# EAGLE board 5x4 Macropad PCB Design (EAGLE 9.7.0)
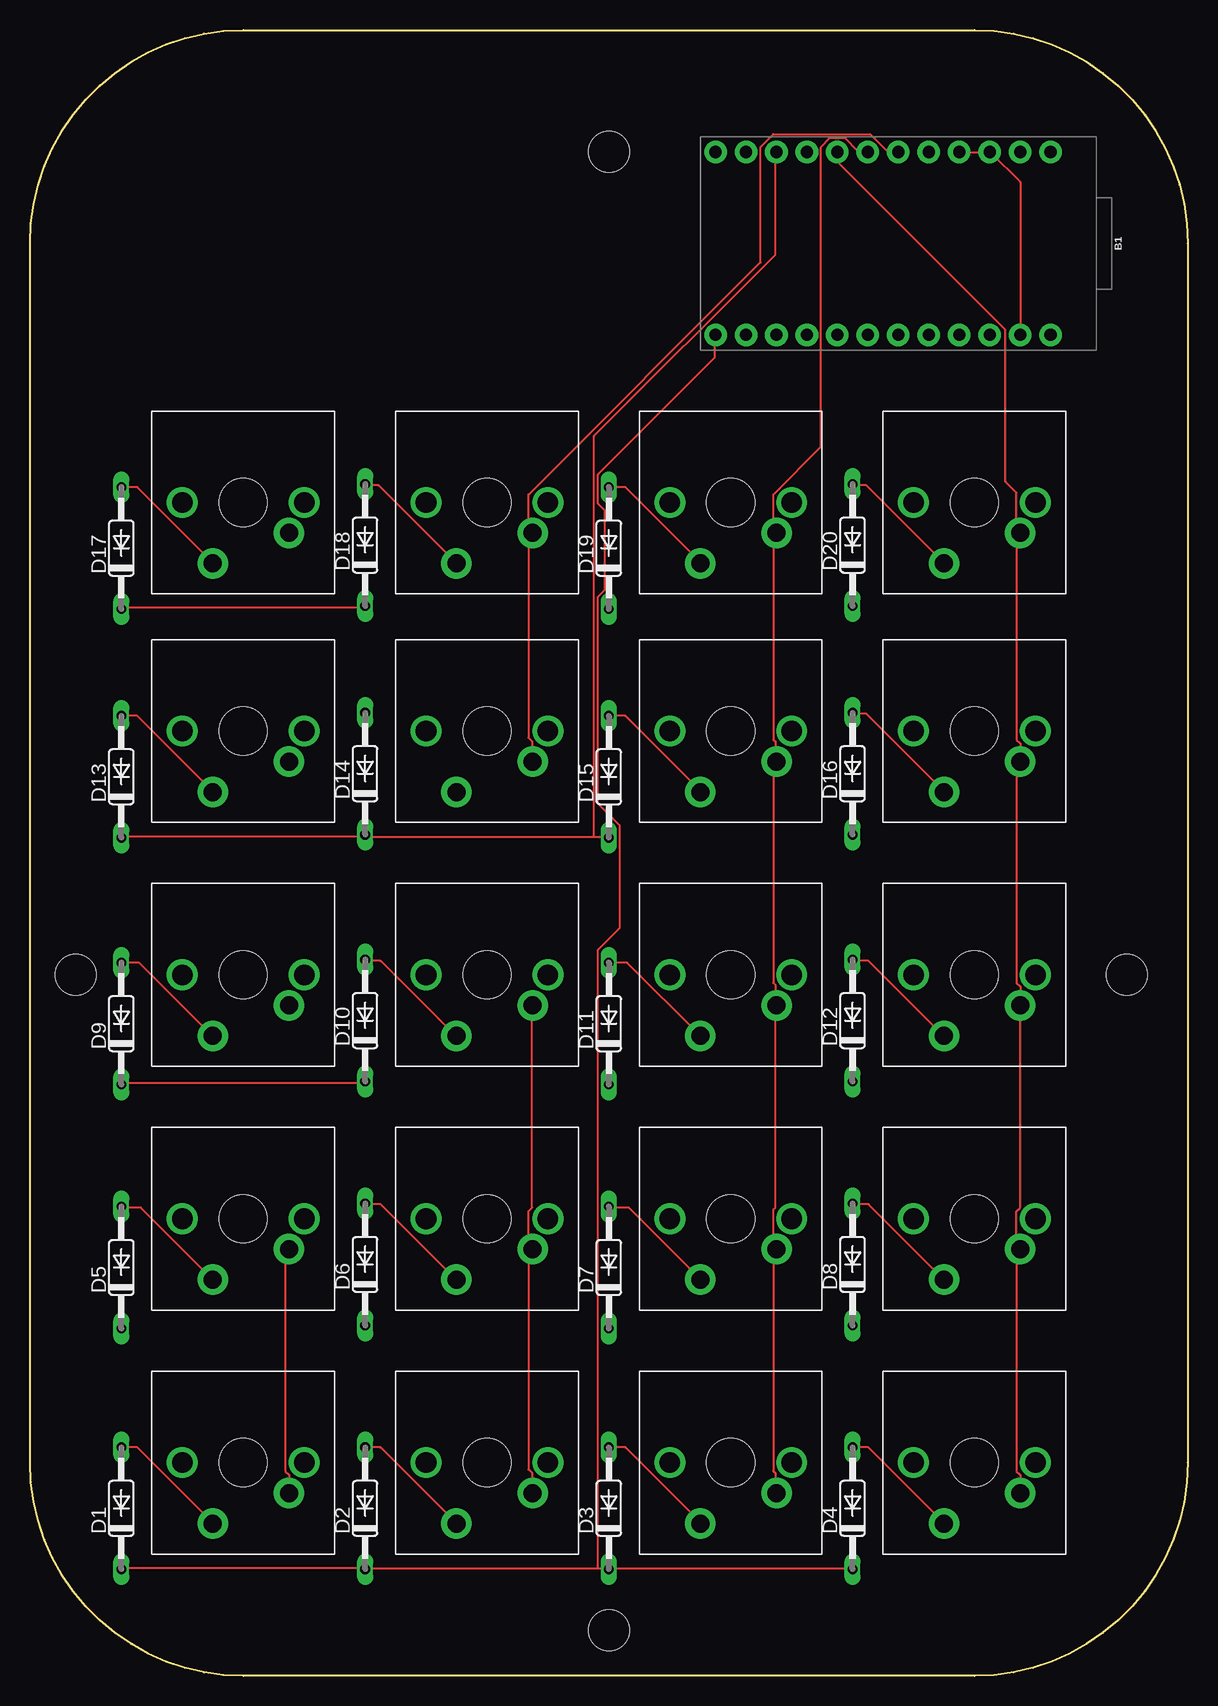
[diagram p0: board, top side]
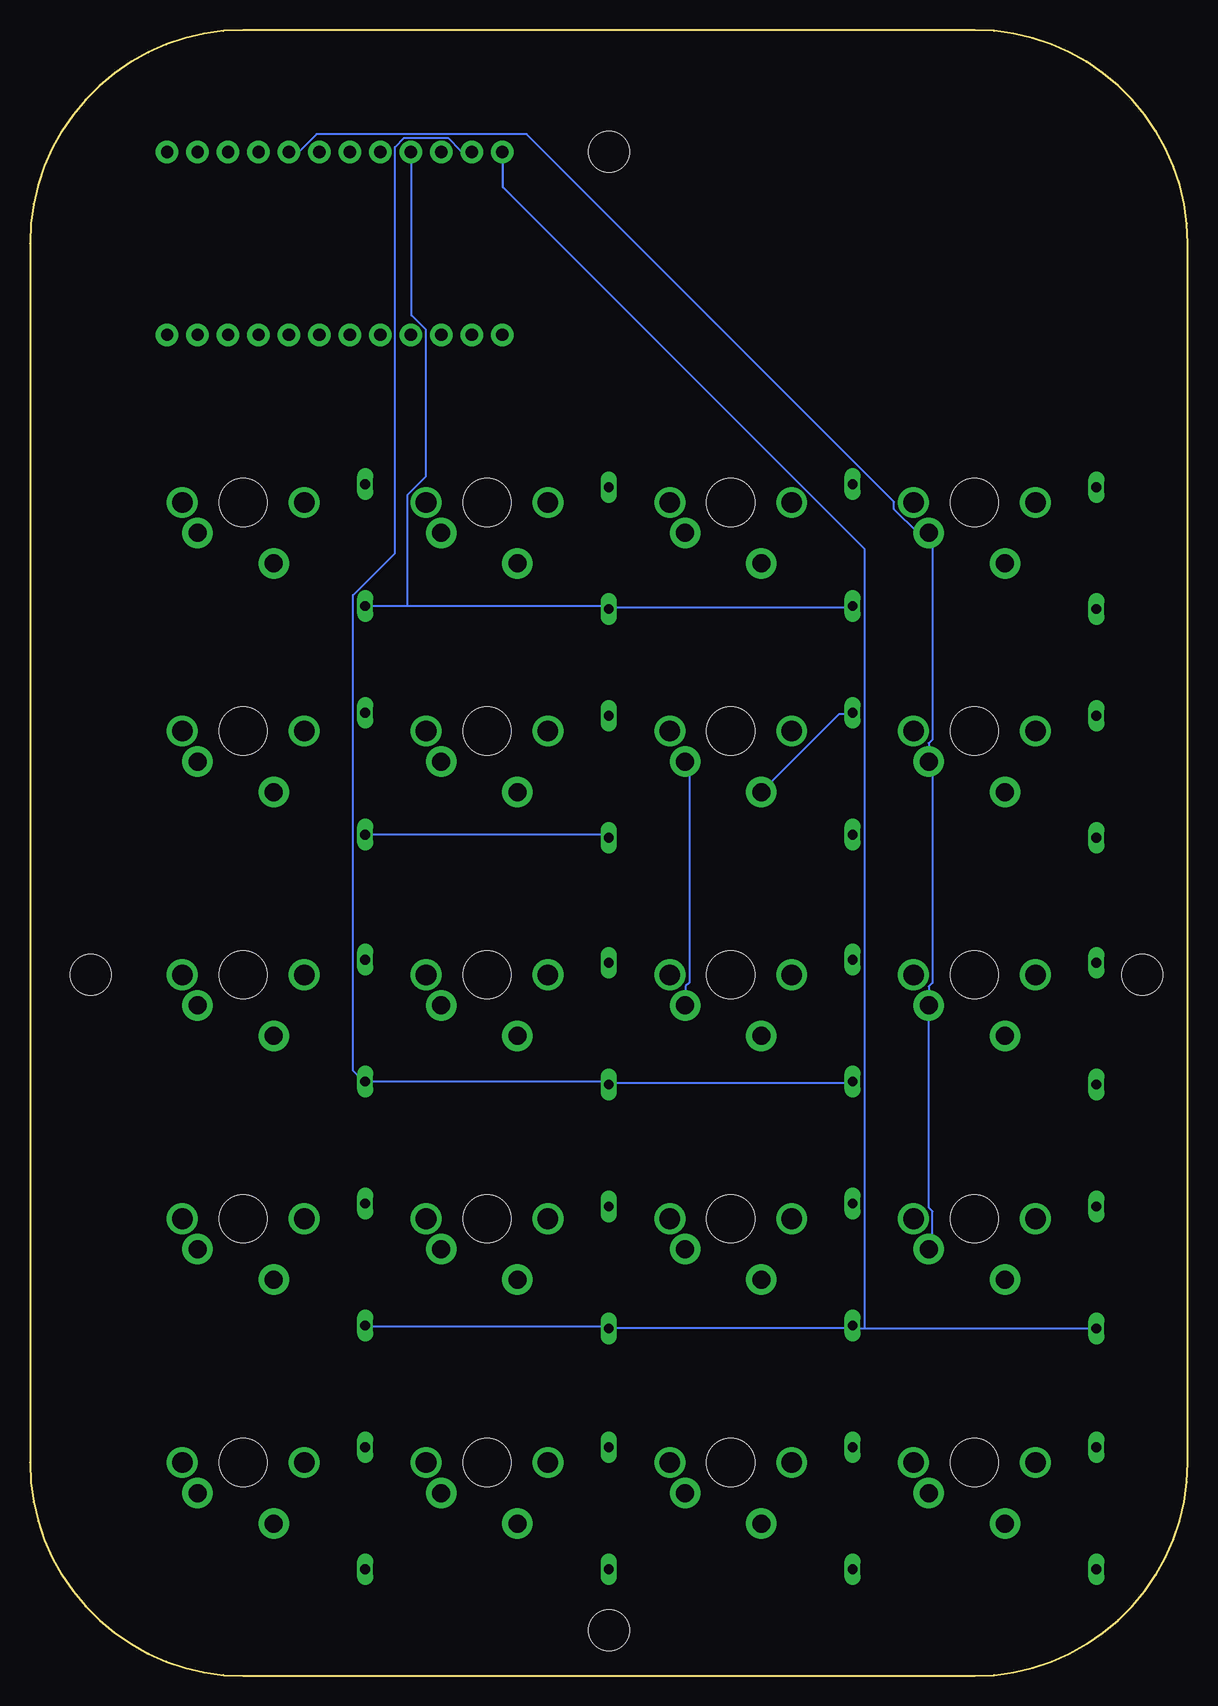
[diagram p1: board, bottom side, seen from below]

Size 96.52 x 137.16 mm. Coordinates in mm from the lower left corner, seen from the top.
Outline: 78.74,137.16 arc-90 96.52,119.38 96.52,17.78 arc-90 78.74,0 17.78,0 arc-90 0,17.78 0,119.38 arc-90 17.78,137.16 78.74,137.16
Copper layers (1*16): Top 0.035mm / dielectric 1.5mm / Bottom 0.035mm
Design rules "Fusion Electronics Design Rules": minimum track width 6mil, minimum drill 0.35mm, track to track 6mil, track to pad 6mil, pad to pad 6mil, via to via 6mil, smd to smd 6mil, copper to edge 40mil, drill to drill 6mil, minimum pad ring 10mil, minimum via ring 8mil, stop-mask expansion 4mil, vias tented up to drill 0mil, thermal gap 10mil
Holes 3.4 mm at 48.26,3.81 48.26,127 91.44,58.42 3.81,58.42

## Footprints (pad centres in the part's own frame; a part is rotated, then mirrored left to right if it is on the bottom)
SPARKFUN_PRO_MICRO = drill 1.016 pad 1.88: 1 -7.62,12.7; 2 -7.62,10.16; 3 -7.62,7.62; 4 -7.62,5.08; 5 -7.62,2.54; 6 -7.62,0; 7 -7.62,-2.54; 8 -7.62,-5.08; 9 -7.62,-7.62; 10 -7.62,-10.16; 11 -7.62,-12.7; 12 -7.62,-15.24; 13 7.62,-15.24; 14 7.62,-12.7; 15 7.62,-10.16; 16 7.62,-7.62; 17 7.62,-5.08; 18 7.62,-2.54; 19 7.62,0; 20 7.62,2.54; 21 7.62,5.08; 22 7.62,7.62; 23 7.62,10.16; 24 7.62,12.7
DO35-10 = drill 0.813 long: A 5.08,0; C -5.08,0
CHERRY-MX = drill 1.714 pad 1.93: P$3 -5.08,0; P$4 5.08,0 | drill 1.5 pad 2.54: SW1 -3.81,2.54; SW2 2.54,5.08 | hole 4: 0,0

## Placement (x,y rotation side)
B1  SPARKFUN_PRO_MICRO  [SPARKFUN_PRO_MICRO]  72.39,119.38 270 top
D1  1N4148DO35-10  [DO35-10]  7.62,13.97 90 top
D2  1N4148DO35-10  [DO35-10]  27.94,13.97 90 top
D3  1N4148DO35-10  [DO35-10]  48.26,13.97 90 top
D4  1N4148DO35-10  [DO35-10]  68.58,13.97 90 top
D5  1N4148DO35-10  [DO35-10]  7.62,34.04 90 top
D6  1N4148DO35-10  [DO35-10]  27.94,34.29 90 top
D7  1N4148DO35-10  [DO35-10]  48.26,34.04 90 top
D8  1N4148DO35-10  [DO35-10]  68.58,34.29 90 top
D9  1N4148DO35-10  [DO35-10]  7.62,54.36 90 top
D10  1N4148DO35-10  [DO35-10]  27.94,54.61 90 top
D11  1N4148DO35-10  [DO35-10]  48.26,54.36 90 top
D12  1N4148DO35-10  [DO35-10]  68.58,54.61 90 top
D13  1N4148DO35-10  [DO35-10]  7.62,74.93 90 top
D14  1N4148DO35-10  [DO35-10]  27.94,75.18 90 top
D15  1N4148DO35-10  [DO35-10]  48.26,74.93 90 top
D16  1N4148DO35-10  [DO35-10]  68.58,75.18 90 top
D17  1N4148DO35-10  [DO35-10]  7.62,93.98 90 top
D18  1N4148DO35-10  [DO35-10]  27.94,94.23 90 top
D19  1N4148DO35-10  [DO35-10]  48.26,93.98 90 top
D20  1N4148DO35-10  [DO35-10]  68.58,94.23 90 top
U$1  CHERRY-MX  [CHERRY-MX]  17.78,17.78 180 top
U$2  CHERRY-MX  [CHERRY-MX]  38.1,17.78 180 top
U$3  CHERRY-MX  [CHERRY-MX]  58.42,17.78 180 top
U$4  CHERRY-MX  [CHERRY-MX]  78.74,17.78 180 top
U$5  CHERRY-MX  [CHERRY-MX]  17.78,38.1 180 top
U$6  CHERRY-MX  [CHERRY-MX]  38.1,38.1 180 top
U$7  CHERRY-MX  [CHERRY-MX]  58.42,38.1 180 top
U$8  CHERRY-MX  [CHERRY-MX]  78.74,38.1 180 top
U$9  CHERRY-MX  [CHERRY-MX]  17.78,58.42 180 top
U$10  CHERRY-MX  [CHERRY-MX]  38.1,58.42 180 top
U$11  CHERRY-MX  [CHERRY-MX]  58.42,58.42 180 top
U$12  CHERRY-MX  [CHERRY-MX]  78.74,58.42 180 top
U$13  CHERRY-MX  [CHERRY-MX]  17.78,78.74 180 top
U$14  CHERRY-MX  [CHERRY-MX]  38.1,78.74 180 top
U$15  CHERRY-MX  [CHERRY-MX]  58.42,78.74 180 top
U$16  CHERRY-MX  [CHERRY-MX]  78.74,78.74 180 top
U$17  CHERRY-MX  [CHERRY-MX]  17.78,97.79 180 top
U$18  CHERRY-MX  [CHERRY-MX]  38.1,97.79 180 top
U$19  CHERRY-MX  [CHERRY-MX]  58.42,97.79 180 top
U$20  CHERRY-MX  [CHERRY-MX]  78.74,97.79 180 top

## Library data of the parts
B1 = SparkFun-Boards
D1-D20 = diode
U$1-U$20 = cherrymx

## Nets
GND: B1.3 B1.4 B1.23
N$1: D1.A U$1.SW2
N$2: D2.A U$2.SW2
N$3: D3.A U$3.SW2
N$4: D4.A U$4.SW2
N$5: D5.A U$5.SW2
N$6: D6.A U$6.SW2
N$7: D7.A U$7.SW2
N$8: D8.A U$8.SW2
N$9: D9.A U$9.SW2
N$10: D10.A U$10.SW2
N$11: D11.A U$11.SW2
N$12: D12.A U$12.SW2
N$13: D13.A U$13.SW2
N$14: D14.A U$14.SW2
N$15: D15.A U$15.SW2
N$16: D16.A U$16.SW2
N$17: D17.A U$17.SW2
N$18: D18.A U$18.SW2
N$19: D19.A U$19.SW2
N$20: D20.A U$20.SW2
N$21: B1.8 U$4.SW1 U$8.SW1 U$12.SW1 U$16.SW1 U$20.SW1
N$22: B1.7 U$3.SW1 U$7.SW1 U$11.SW1 U$15.SW1 U$19.SW1
N$23: B1.6 U$2.SW1 U$6.SW1 U$10.SW1 U$14.SW1 U$18.SW1
N$24: B1.5 U$1.SW1 U$5.SW1 U$9.SW1 U$13.SW1 U$17.SW1
N$25: B1.9 D17.C D18.C D19.C D20.C
N$26: B1.10 D13.C D14.C D15.C D16.C
N$27: B1.11 D9.C D10.C D11.C D12.C
N$28: B1.12 D5.C D6.C D7.C D8.C
N$29: B1.13 D1.C D2.C D3.C D4.C
RAW: B1.24
VCC: B1.21

## Tracks (layer width: path | path; a pad name or v marks a point on that pad's centre or on a via)
GND
  Top 0.152: B1.4 77.52,126.95 79.96,126.95 B1.3 80.11,126.95 82.55,124.51 82.55,111.86 B1.23
N$1
  Top 0.152: D1.A 7.72,19.05 8.94,19.05 15.19,12.8 U$1.SW2
N$2
  Top 0.152: D2.A 27.99,19.05 29.21,19.05 35.46,12.8 U$2.SW2
N$3
  Top 0.152: D3.A 49.63,19.05 55.88,12.8 U$3.SW2
N$4
  Top 0.152: D4.A 68.68,19.05 69.9,19.05 76.15,12.8 U$4.SW2
N$5
  Top 0.152: D5.A 7.72,39.01 9.25,39.01 15.19,33.07 U$5.SW2
N$6
  Top 0.152: D6.A 27.99,39.32 29.21,39.32 35.46,33.07 U$6.SW2
N$7
  Top 0.152: D7.A 48.26,39.01 49.94,39.01 55.88,33.07 U$7.SW2
N$8
  Top 0.152: D8.A 68.68,39.32 69.9,39.32 76.15,33.07 U$8.SW2
N$9
  Top 0.152: D9.A 7.72,59.44 9.09,59.44 15.19,53.34 U$9.SW2
N$10
  Top 0.152: D10.A 27.99,59.59 29.21,59.59 35.46,53.34 U$10.SW2
N$11
  Top 0.152: D11.A 49.78,59.44 U$11.SW2
N$12
  Top 0.152: D12.A 68.68,59.59 69.9,59.59 76.15,53.34 U$12.SW2
N$13
  Top 0.152: D13.A 7.72,80.01 8.94,80.01 15.19,73.76 U$13.SW2
N$14
  Bottom 0.152: D14.A 27.99,80.16 29.06,80.16 35.46,73.76 U$14.SW2
N$15
  Top 0.152: D15.A 49.63,80.01 55.88,73.76 U$15.SW2
N$16
  Top 0.152: D16.A 68.68,80.16 69.75,80.16 76.15,73.76 U$16.SW2
N$17
  Top 0.152: D17.A 7.72,99.06 8.94,99.06 15.19,92.81 U$17.SW2
N$18
  Top 0.152: D18.A 27.99,99.21 29.06,99.21 35.46,92.81 U$18.SW2
N$19
  Top 0.152: D19.A 49.63,99.06 55.88,92.81 U$19.SW2
N$20
  Top 0.152: D20.A 68.68,99.21 69.75,99.21 76.15,92.81 U$20.SW2
N$21
  Top 0.152: U$4.SW1 82.55,16.76 82.24,17.07 82.24,35.2 82.55,35.51 U$8.SW1 82.55,35.66 82.24,35.97 82.24,38.71 82.55,39.01 82.55,55.78 U$12.SW1 82.55,55.93 82.55,57.45 82.24,57.76 82.24,75.89 U$16.SW1 82.55,77.72 82.24,78.03 82.24,94.95 U$20.SW1 82.24,95.56 82.24,98.6 81.33,99.52 81.33,112.17 67.31,126.19 67.31,126.95 B1.8
N$22
  Top 0.152: U$3.SW1 62.13,15.24 62.13,16.92 61.98,17.07 61.98,35.36 62.13,35.51 U$7.SW1 62.13,35.66 61.98,35.81 61.98,38.86 62.13,39.01 62.13,55.78 U$11.SW1 62.13,55.93 62.13,57.61 61.98,57.76 61.98,76.05 62.13,76.2 | 61.98,95.4 61.98,98.45 65.94,102.41 65.94,127.41 66.7,128.17 67.92,128.17 68.99,127.1 69.75,127.1 B1.7 | 61.98,95.4 62.13,95.25 U$19.SW1 61.98,95.4 | 62.13,76.2 62.13,77.88 61.98,78.03 61.98,95.4 | 62.13,76.2 U$15.SW1 62.13,76.2
N$23
  Top 0.152: U$2.SW1 41.86,15.24 41.86,16.92 41.55,17.22 41.55,35.2 41.86,35.51 U$6.SW1 41.86,35.66 41.55,35.97 41.55,38.71 41.86,39.01 41.86,55.78 U$10.SW1 | 41.86,95.25 41.55,95.56 41.55,98.45 60.91,117.8 60.91,127.41 61.98,128.47 70.05,128.47 71.42,127.1 72.34,127.1 B1.6 | 41.86,95.25 U$18.SW1 41.86,95.25 | 41.86,95.25 41.55,94.95 41.55,78.18 41.86,77.88 41.86,76.2 U$14.SW1
  Bottom 0.152: U$10.SW1 41.86,55.93 41.86,57.45 41.55,57.76 41.55,75.89 41.86,76.2 U$14.SW1
N$24
  Top 0.152: U$1.SW1 21.59,16.76 21.29,17.07 21.29,35.2 21.59,35.51 U$5.SW1
  Bottom 0.152: U$5.SW1 21.59,35.66 21.29,35.97 21.29,38.71 21.59,39.01 21.59,55.78 U$9.SW1 21.59,55.93 21.59,57.45 21.29,57.76 21.29,75.89 U$13.SW1 21.59,77.72 21.29,78.03 21.29,94.95 U$17.SW1 22.5,95.25 24.49,97.23 24.49,97.84 55.12,128.47 72.64,128.47 74.02,127.1 74.93,127.1 B1.5
N$25
  Top 0.152: D17.C 7.72,89 27.69,89 27.84,89.15 D18.C
  Bottom 0.152: 48.26,89 28.14,89 27.99,89.15 D18.C | 48.26,89 D19.C 48.26,89 | 65.02,89.15 48.41,89.15 48.26,89 | 65.02,89.15 68.53,89.15 D20.C | 65.02,89.15 65.02,98.45 63.5,99.97 63.5,112.17 64.72,113.39 64.72,126.95 B1.9
N$26
  Top 0.152: D13.C 7.72,69.95 27.69,69.95 27.84,70.1 D14.C 27.99,70.1 28.14,69.95 47.04,69.95 | 47.04,69.95 48.26,69.95 D15.C | 47.04,69.95 47.04,103.33 62.13,118.42 62.13,126.95 B1.10
  Bottom 0.152: D16.C 68.53,70.1 48.41,70.1 48.26,69.95 D15.C
N$27
  Top 0.152: D9.C 7.72,49.38 27.69,49.38 27.84,49.53 D10.C
  Bottom 0.152: 48.26,49.38 28.14,49.38 27.99,49.53 D10.C | 48.26,49.38 D11.C 48.26,49.38 | 48.26,49.38 48.41,49.53 68.53,49.53 D12.C 68.68,49.53 69.6,50.44 69.6,90.07 66.09,93.57 66.09,127.41 65.33,128.17 61.67,128.17 60.6,127.1 59.69,127.1 B1.11
N$28
  Bottom 0.152: 26.92,28.96 27.69,28.96 27.84,29.11 D6.C 27.99,29.11 28.14,28.96 D7.C 48.41,29.11 68.53,29.11 D8.C | 26.92,28.96 7.72,28.96 D5.C | 26.92,28.96 26.92,93.88 57.1,124.05 57.1,126.95 B1.12
N$29
  Top 0.152: D1.C 7.72,8.99 27.84,8.99 D2.C 27.99,8.99 47.35,8.99 | 47.35,8.99 48.26,8.99 | 48.26,8.99 D3.C 48.26,8.99 | 48.26,8.99 68.53,8.99 D4.C | 47.35,8.99 47.35,60.5 49.17,62.33 49.17,70.87 47.35,72.7 47.35,89.92 47.95,90.53 47.95,97.08 47.35,97.69 47.35,100.13 57.1,109.88 57.1,111.71 B1.13